# Altium PCB Bop_It (1).PcbDoc
Units mil, origin at the board's own origin, x right, y up, seen from the top; angles counter-clockwise.
Board outline 4495 x 3000 mil, 2 copper layers (Top Layer, Bottom Layer); 18 components, 17 nets, 72 pads, 6 vias.
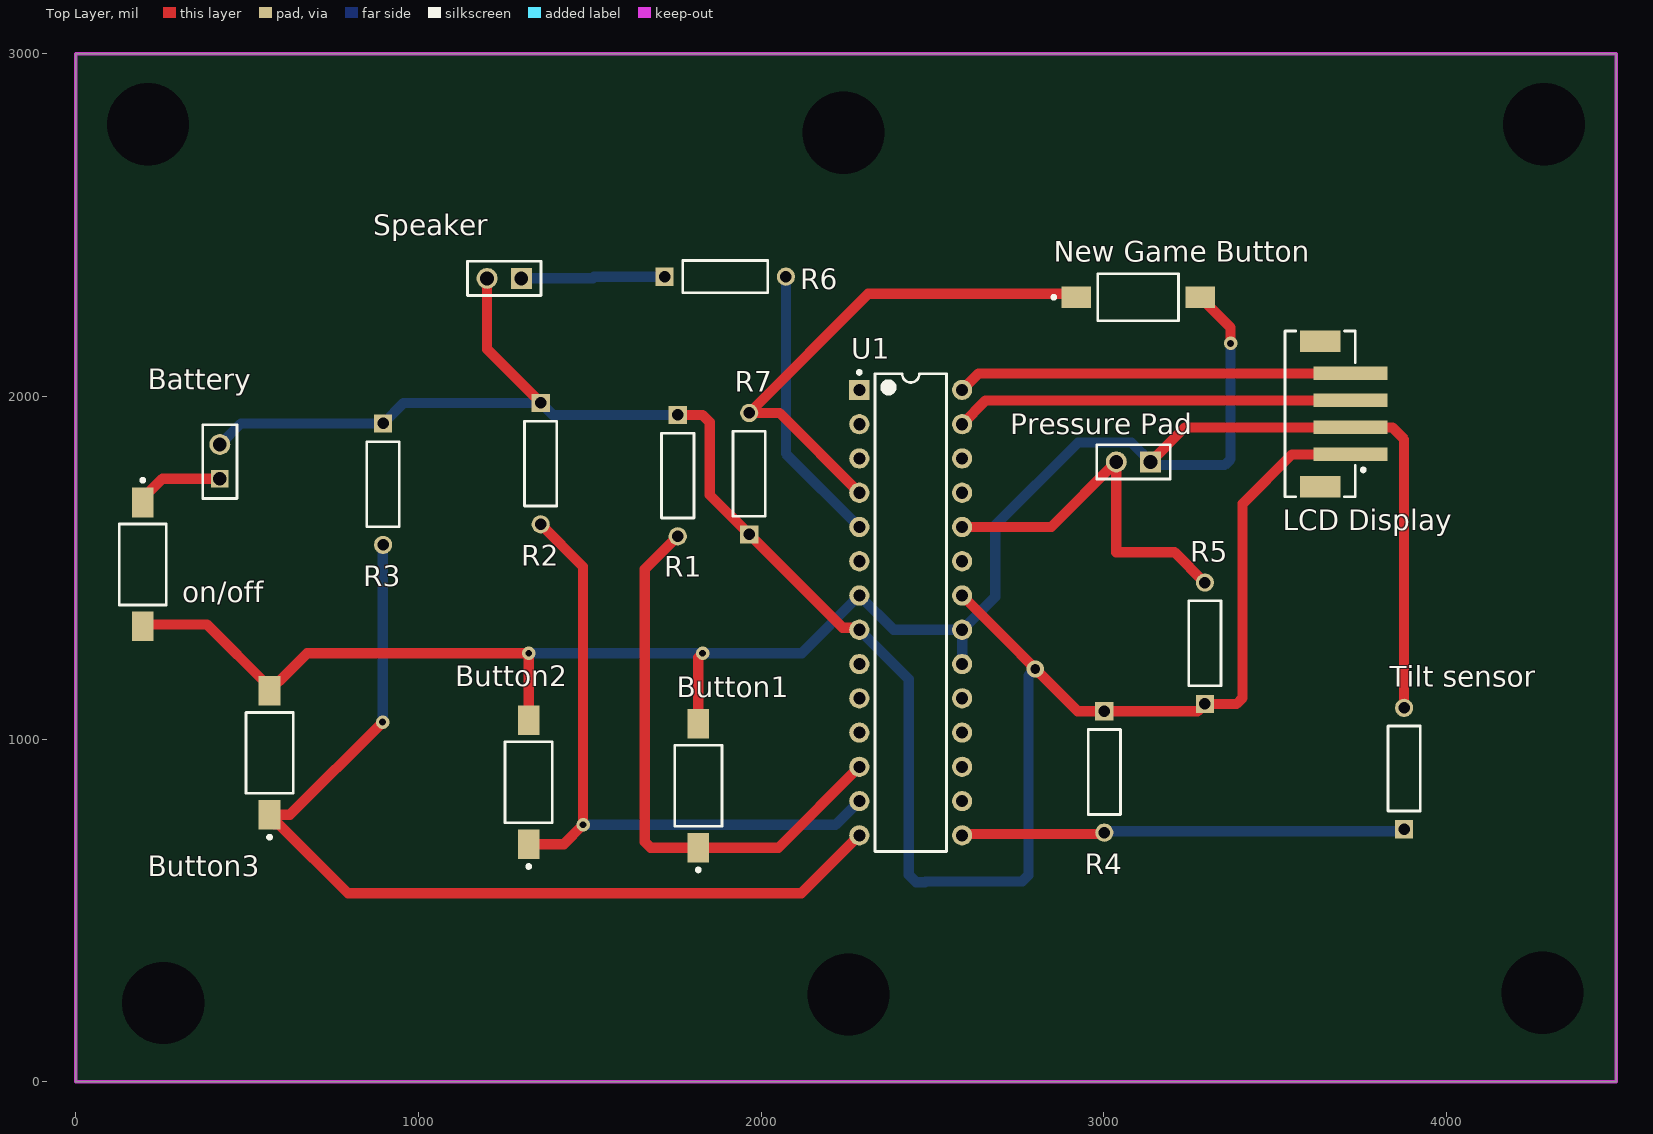
[diagram p0: Top Layer view]
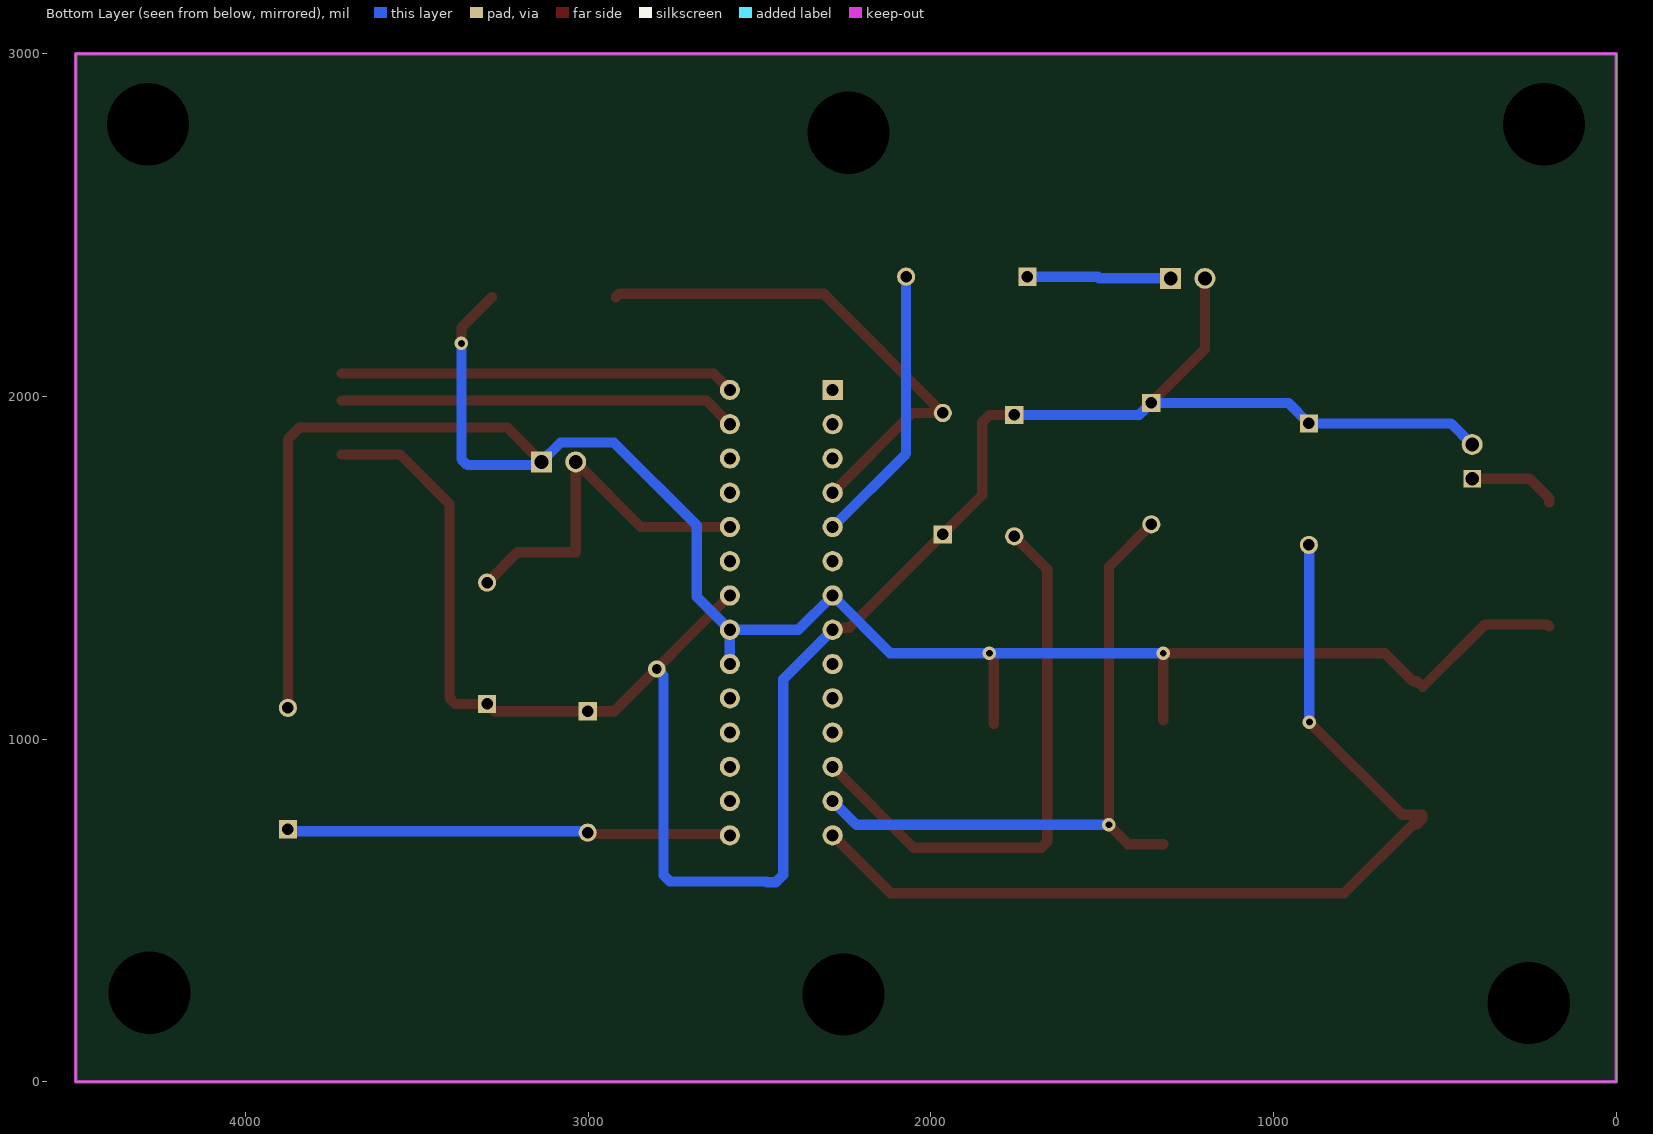
[diagram p1: Bottom Layer view, seen from below]
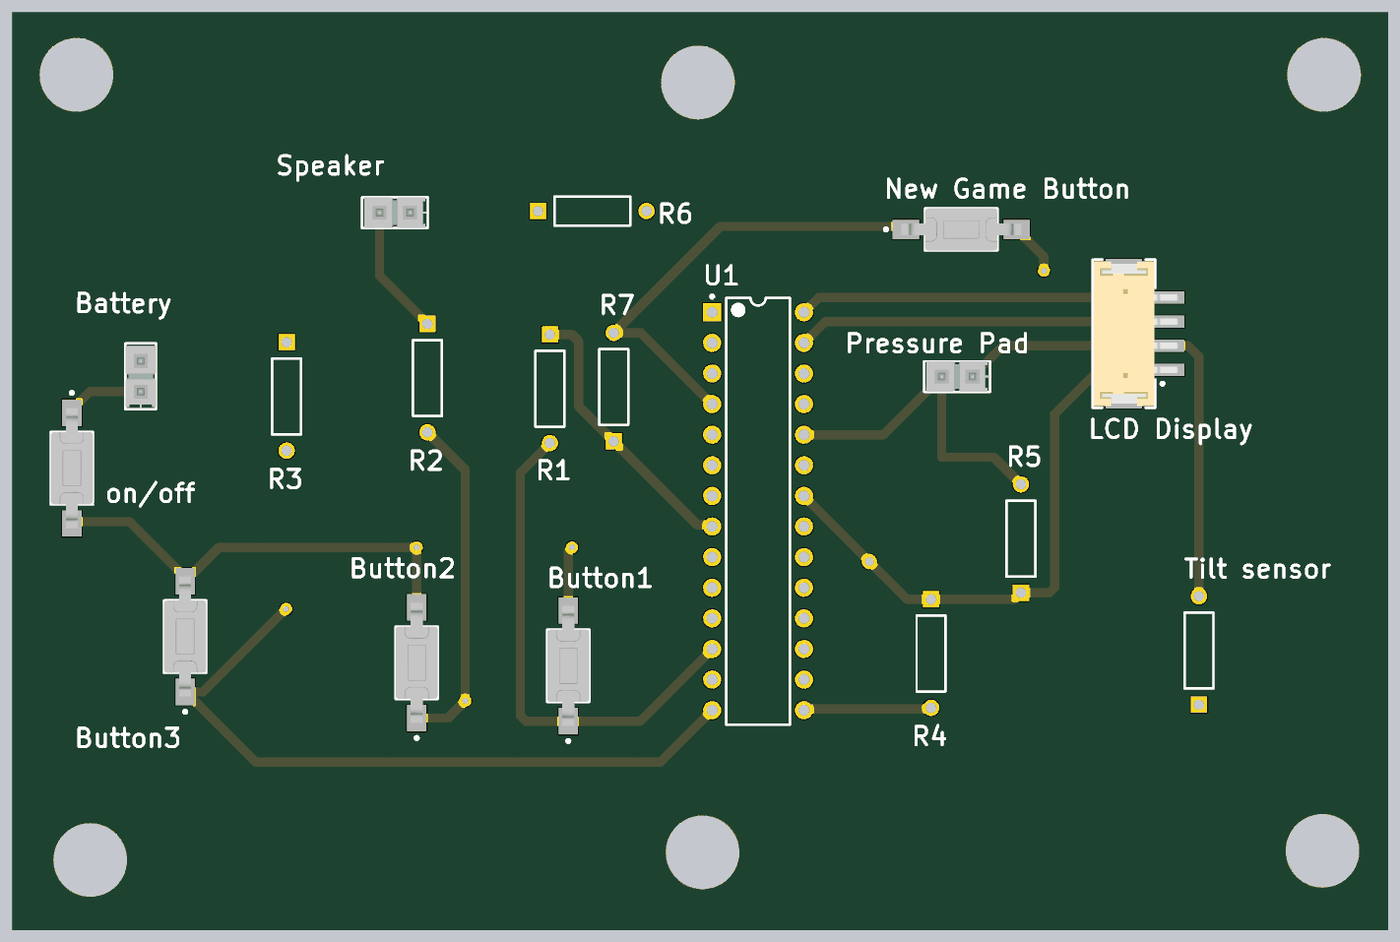
[diagram p2: 3D render of the assembled board from above, using the file's embedded part models]

## Layer stack, top to bottom
Top Solder: solder mask 0.4, Solder Resist, Dk 3.5
Top Layer: signal copper 1.4
Dielectric 1: dielectric 12.6, FR-4, Dk 4.8
Bottom Layer: signal copper 1.4
Bottom Solder: solder mask 0.4, Solder Resist, Dk 3.5

## Board outline
0,0 4495,0 4495,3000 0,3000

## Design rules (kind name [scope] priority, off if disabled: settings)
BoardOutlineClearance [All] p1: gap=7.87 ignorepadtopadclearanceinfootprint=FALSE except(15.75: Arc-SplitBarrior Arc-SplitContinuation Track-SplitBarrior Track-SplitContinuation SMDPad-SplitBarrior SMDPad-SplitContinuation THPad-SplitBarrior THPad-SplitContinuation Via-SplitBarrior Via-SplitContinuation Fill-SplitBarrior Fill-SplitContinuation Poly-SplitBarrior Poly-SplitContinuation Region-SplitBarrior Region-SplitContinuation Text-SplitBarrior Text-SplitContinuation)
Clearance "Clearance Bottom Layer" [OnLayer('Bottom Layer')] p1: gap=8 ignorepadtopadclearanceinfootprint=TRUE except(10: Arc-Text Track-Text SMDPad-Text THPad-Text Via-Text Fill-Text Poly-Text Region-Text Text-Text)
Clearance "Clearance Top Layer" [OnLayer('Top Layer')] p2: gap=8 ignorepadtopadclearanceinfootprint=TRUE except(10: Arc-Text Track-Text SMDPad-Text THPad-Text Via-Text Fill-Text Poly-Text Region-Text Text-Text)
Clearance [All] p3: gap=7.87 ignorepadtopadclearanceinfootprint=FALSE except(3.5: Arc-Arc Arc-Track Arc-SMDPad Track-Track Track-SMDPad SMDPad-SMDPad; 5: Arc-Via Track-Via SMDPad-Via THPad-Via Via-Via; 10: Arc-Text Track-Text SMDPad-Text THPad-Text Via-Text Fill-Text Poly-Text Region-Text Text-Text)
HoleSize [All] p1: absolutevalues=TRUE maxlimit=248.03 minlimit=7.87 maxpercent=80.000 minpercent=20.000
MinimumAnnularRing [All] p1: minimumring=3
MinimumSolderMaskSliver [All] p1: minsoldermaskwidth=3.94
PolygonConnect PolygonConnect_1 [All] p1: thpad.connectstyle=Relief thpad.reliefconductorwidth=20 thpad.reliefentries=4 thpad.polygonreliefangle="90 Angle" thpad.airgapwidth=10 smdpad.connectstyle=Relief smdpad.reliefconductorwidth=20 smdpad.reliefentries=4 smdpad.polygonreliefangle="90 Angle" smdpad.airgapwidth=10 via.connectstyle=Direct via.reliefconductorwidth=20 via.reliefentries=4 via.polygonreliefangle="90 Angle" via.airgapwidth=10
RoutingCorners [All] p1: cornerstyle=Round minsetback=100 maxsetback=100
RoutingVias [All] p1: holewidth=19.68 width=39.37 viastyle="Through Hole" minholewidth=7.87 minwidth=17.72 maxholewidth=39.37 maxwidth=78.74
SilkToSilkClearance [All] p1: silktosilkclearance=3.94
SilkToSolderMaskClearance [IsPad] p1: minsilkscreentomaskgap=3.94 clearancetoexposedcopper=TRUE
SolderMaskExpansion [All] p1: expansion=4 istentingtop=FALSE
Width [All] p1: maxlimit=100 minlimit=3.5 preferedwidth=15
25 further rules are at their usual default settings.

## Components (designator, comment, footprint, x,y, rotation, side; value= is the part's Value field where it differs from the comment)
Battery "1=V, 2=GND" SMTC-TSW-102-26-XX-S#1 420,1760 r90 top
Button1 "FSMSM" TECO-FSMSM-2_V 1816.42,864.37 r90 top
Button2 "FSMSM" TECO-FSMSM-2_V 1321.42,874.37 r90 top
Button3 "FSMSM" TECO-FSMSM-2_V 565,960 r90 top
"LCD Display" "1GND, 2V, 3SDA, 4SCL" 620304124022 3631.42,1949.37 r270 top
"New Game Button" "FSMSM" TECO-FSMSM-2_V 3100,2290 r0 top
on/off "FSMSM" TECO-FSMSM-2_V 195,1510 r270 top
"Pressure Pad" "1=V, 2=GND" SMTC-TSW-102-26-XX-S#2 3136.42,1809.37 r180 top
R1 "1k" RESA60-630X240 1756.42,1769.37 r270 top
R2 "1k" RESA60-630X240 1356.42,1804.37 r270 top
R3 "1k" RESA60-630X240 896.42,1744.37 r270 top
R4 "1k" RESA60-630X240 3001.42,904.37 r270 top
R5 "1k" RESA60-630X240 3295,1280 r90 top
R6 "150 Ohms" RESA60-630X240 1895,2350 r0 top
R7 "1k" RESA60-630X240 1965,1775 r90 top
Speaker "1=V, 2=GND" SMTC-TSW-102-26-XX-S#2 1300,2345 r180 top
"Tilt sensor" "Model" RESA60-630X240 3876.42,914.37 r90 top
U1 "ATmega328P-PU" 28P3 2436.42,1369.37 r0 top

## Footprints (in the part's own frame and the unit in brackets; to place one, negate y for a bottom-side part, rotate by r counter-clockwise, add the part's x,y. Pads: shape width x height; smd on the part's side, far side on the other; paste and mask are expansions set on the pad)
28P3 [mm] "28-Pin Plastic Dual In-Line Package (PDIP)"
  rect 1.5x1.5 hole 0.9: 1(-3.81,16.51)
  round 1.5 hole 0.9: 2(-3.81,13.97) 3(-3.81,11.43) 4(-3.81,8.89) 5(-3.81,6.35) 6(-3.81,3.81) 7(-3.81,1.27) 8(-3.81,-1.27) 9(-3.81,-3.81) 10(-3.81,-6.35) 11(-3.81,-8.89) 12(-3.81,-11.43) 13(-3.81,-13.97) 14(-3.81,-16.51) 15(3.81,-16.51) 16(3.81,-13.97) 17(3.81,-11.43) 18(3.81,-8.89) 19(3.81,-6.35) 20(3.81,-3.81) 21(3.81,-1.27) 22(3.81,1.27) 23(3.81,3.81) 24(3.81,6.35) 25(3.81,8.89) 26(3.81,11.43) 27(3.81,13.97) 28(3.81,16.51)
  silkscreen extent -3.93,-17.7 2.65,17.93, body extent -3.6,-17.65 3.6,17.65, height 4.58
620304124022 [mm] "2.00mm SMT Male Vertical Shrouded Header, 4p"
  rect 1x5.5 smd: 1(3,2.25) 2(1,2.25) 3(-1,2.25) 4(-3,2.25)
  rect 1.6x3 smd: MP1(-5.4,0) MP2(5.4,0)
  silkscreen extent -6.15,-2.6 6.15,3.32, body extent -6,-2.5 6,4.51, height 6.77
RESA60-630X240 [mm] "Axial Resistor, 2-Leads, Dia 2.4mm, Body Length 6.3mm"
  rect 1.35x1.35 hole 0.85: 1(-4.5,0)
  round 1.35 hole 0.85: 2(4.5,0)
  silkscreen extent -3.15,-1.2 3.15,1.2, body extent -3.15,-1.2 3.15,1.2, height 2.4
SMTC-TSW-102-26-XX-S#1 [mm] ".025 SQ Post Terminal Strip Assembly, 1x2 Pins, Vertical, 2.54mm Pitch, Male"
  rect 1.296x1.296 hole 1.02: 1(0,0)
  round 1.55 hole 1.02 mask+0.127: 2(2.54,0)
  silkscreen extent -1.46,-1.27 4,1.27, body extent -1.4,-1.27 3.81,1.27, height 8.38
SMTC-TSW-102-26-XX-S#2 [mm] ".025 SQ Post Terminal Strip Assembly, 1x2 Pins, Vertical, 2.54mm Pitch, Male"
  rect 1.55x1.55 hole 1.02: 1(0,0)
  round 1.55 hole 1.02: 2(2.54,0)
  silkscreen extent -1.46,-1.27 4,1.27, body extent -1.4,-1.27 3.81,1.27, height 8.38
TECO-FSMSM-2_V [mm] "SMD, 2-Leads, Body 6x3.5mm, Pitch 9.19mm"
  rect 2.2x1.6 smd: 1(-4.595,0)
  rect 2.18x1.6 smd: 2(4.595,0)
  silkscreen extent -6.37,-1.75 3,1.75, body extent -4.98,-1.75 4.98,1.75, height 4.4

## Part data
Battery "Pressure Pad" Speaker: library part CMP-1024-00329-1, "0.025\" SQ Post Header, Through-hole, Vertical, -55 to 125 degC, 2.54 mm Pitch, 2-Pin, Male, RoHS", Manufacturer=Samtec, PartNumber=TSW-102-26-F-S, Temperature Range="-55 to 125 degC", ComponentLink1Description="Manufacturer URL", ComponentLink1URL=http://www.samtec.com, ComponentLink2Description=Datasheet, ComponentLink2URL=http://www.samtec.com/documents/webfiles/pdf/TSW_TH.PDF, ComponentLink3Description="Package Specification", ComponentLink3URL=http://www.samtec.com/documents/webfiles/cpdf/TSW-XXX-XX-XXX-X-XX-XXX-MKT.pdf, DatasheetVersion=F-214, Mounting Technology=Through-hole, Orientation=Vertical, PackageDescription=".025[0.64] SQ. Post Terminal Strip Assembly", PackageReference=TSW-102-26-XX-S, PackageVersion="DM, 8/1988", Pitch="2.54 mm", RoHS=True
Button1 Button2 Button3 "New Game Button" on/off: library part CMP-2000-07511-1, "FSMSM Push Button Switch, 50 mA, -35 to 85 degC, 2-Pin SMD, RoHS, Bulk", Case\/Package=SMD/SMT, Contact Current Rating=50mA, Contact Resistance=100mOhm, Manufacturer="TE Connectivity", Max Operating Temperature=85degC, Max Voltage Rating (DC)=12V, Min Operating Temperature=-35degC, Operating Force=180gf, Package Description="2-Pin Surface Mount Device, Body 6 x 3.5 mm, Pitch 9.19 mm", Package Quantity=1000, Voltage Rating (DC)=24V, Actuator Length=1.07mm, Actuator Material=Polyamide, Contact Material=Brass, Contact Plating=Silver, Current Rating=50mA, Datasheet URL=http://www.te.com/commerce/DocumentDelivery/DDEController?Action=showdoc&DocId=Customer+Drawing%7F1437566-3%7FC2%7Fpdf%7FEnglish%7FENG_CD_1437566-3_C2_1437566_3_1_c.dwg.pdf%7F1437566-3, Datasheet Version="Rev. C2, 08/2014", Electrical Life=20000Cycles, ELV=Compliant, Illumination Type=Illuminated, Lead Free=LeadFree, Manufacturer URL=http://www.te.com/, Mechanical Life=20000Cycles, Mount=SurfaceMount, Mounting Technology=SurfaceMount, Orientation=Straight, Package Reference=FSMSM, Packaging=LoosePiece, REACH SVHC=Unknown, RoHSCompliant=true, Switch Travel=0.25mm, Termination=GullWing, Throw Configuration=SPST
"LCD Display": library part CMP-1502-00662-1, "Male Shrouded Header WR-WTB, SMT, Vertical, pitch 2 mm, 1 x 4 position", Contact Resistance=20mOhm, Manufacturer="Wurth Elektronik", Operating Temperature=-25to85degC, Package Reference=620304124022, Working Voltage=100VAC, Datasheet URL=https://katalog.we-online.de/em/datasheet/6203xx124022.pdf, Gender=Male, Manufacturer URL=http://www.we-online.de, Mounting Technology=SMT, Orientation=Vertical, Packaging=TapeandReel, Part Number=620304124022, Pitch=2mm, Position=1x4, Publisher=WurthElektronik
R1 R2 R3 R4 R5 R6 R7 "Tilt sensor": library part CMP-1659-00075-1, "Axial Resistor, 1 KOhm, +/- 1%, 250 mW, -55 to 155 degC, 2-Pin THD, RoHS, Bulk", Case\Package=Axial, Max Operating Temperature="155 degC", Min Operating Temperature="-55 degC", Package Quantity=200, Power Rating="250 mW", Resistance="10 kohm", Tolerance=1%, Voltage Rating="250 V", ComponentLink1Description="Manufacturer URL", ComponentLink1URL=http://www.yageo.com/, ComponentLink2Description=Datasheet, ComponentLink2URL=http://www.yageo.com/documents/recent/Yageo%20LR_MFR_2013.pdf, DatasheetVersion=Apr-13, Length="0.248 inch", PackageDescription="2-Pin Axial Lead, Dia 2.4 mm, Body Length 6.3 mm", PackageReference=MFR-25, Packaging=Bulk, RoHSCompliant=true
U1: library part CMP-0095-00013-2, "8-bit AVR Microcontroller, 32KB Flash, 1KB EEPROM, 2KB SRAM, 28-pin PDIP, Industrial Grade (-40°C to 85°C)", ComponentLink1Description="Manufacturer URL", ComponentLink1URL=http://www.atmel.com/, ComponentLink2Description="ATmega48A/48PA/88A/88PA/168A/168PA/328/328P Datasheet", ComponentLink2URL=http://www.atmel.com/dyn/resources/prod_documents/8271.pdf, ComponentLink3Description="ATmega48A/48PA/88A/88PA/168A/168PA/328/328P Summary", ComponentLink3URL=http://www.atmel.com/dyn/resources/prod_documents/8271S.pdf, DatasheetVersion="revD, May-2011", PackageDescription="28-lead (0.300\"/7.62mm Wide) Plastic Dual Inline Package (PDIP)", PackageReference=28P3, PackageVersion="revB, Sep-2001", RevisionNote="DatasheetVersion updated. URLs added."

## Free pads (board coordinates)
  round 60 hole 240: 2(210,2795) 2(255,230) 2(2240,2770) 2(2255,255) 2(4280,260) 2(4285,2795)

## Via types
v1: diameter 39.37, hole 19.68, Top Layer to Bottom Layer, 5 vias
v2: diameter 50, hole 28, Top Layer to Bottom Layer, 1 vias

## Nets (pads, with @x,y where several pads share a name; then routed paths per layer and width w, separated by ;. In a path a pad name is that pad's centre, name@x,y a point inside that pad or via, vN(x,y) a via of type N, cw(c..) or ccw(c..) an arc to the next point about the centre after c; other vN are vias at no path point)
1=programmer: U1.1
17=programmer: U1.17
18=programmer: U1.18
19=programmer: U1.19
GND: "LCD Display.1" Battery.2 R1.1 R2.1 R3.1 R4.1 R5.1 R7.1 Speaker.2 U1.8 U1.22 | length 6414
  Top Layer w30: Speaker.2 1200,2137.95 R2.1 ; R1.1@1757.95,1945 R1.1 1828.46,1946.54 1850,1925 1850,1712.83 R7.1 2237.91,1324.93 2280.86,1324.93 U1.8 ; U1.22 2924.25,1081.54 R4.1 3273.7,1081.54 R5.1 3387.43,1102.83 3405,1120.41 3405,1687 3549.26,1831.26 3720,1831.26
  Bottom Layer w30: Battery.2 481.54,1921.54 R3.1 956.42,1981.54 R2.1 1391.42,1946.54 R1.1 ; U1.8 2430.79,1175 2430.79,604.21 2452.57,582.43 2477.43,582.43 2480,585 2762.43,585 2780,602.57 2780,1185 v2(2800,1205)
NetBattery_1: Battery.1 on/off.1 | length 260.5
  Top Layer w30: on/off.1 195,1702.72 252.28,1760 Battery.1
NetButton1_1: Button1.1 R1.2 U1.12 | length 1662.5
  Top Layer w30: R1.2 1660,1495.79 1660,701.04 1677.57,683.46 Button1.1 2050.51,683.46 U1.12
NetButton1_2: "LCD Display.2" "New Game Button.2" "Pressure Pad.1" "Tilt sensor.2" Button1.2 Button2.2 Button3.2 on/off.2 U1.7 U1.20 U1.21 | length 6383.7
  Top Layer w30: on/off.2 200.91,1335 382.32,1335 565,1152.32 581.5,1168.82 592.91,1168.82 675.09,1251 v1(1321.42,1251) Button2.2 ; Button1.2 1816.42,1238.42 v1(1829,1251) ; 3136.42,1809.37 3237.05,1910 3720,1910 3841.42,1910 3876.42,1875 3876.42,1091.54 ; 3280.91,2290 3370,2200.91 v1(3370,2155)
  Bottom Layer w30: v1(1321.42,1251) v1(1829,1251) 2118.05,1251 U1.7 2386.42,1319.37 U1.21 ; U1.20 U1.21 ; v1(3370,2155) 3370,1817.57 3352.43,1800 3145.79,1800 3136.42,1809.37 3079.79,1866 2925,1866 2683,1624 2683,1415.95 U1.21
NetButton2_1: Button2.1 R2.2 U1.13 | length 1945.5
  Top Layer w30: Button2.1 1423.46,693.46 v1(1480,750) 1480,1503.62 R2.2
  Bottom Layer w30: v1(1480,750) 2217.05,750 U1.13
NetButton3_1: Button3.1 R3.2 U1.14 | length 2853.4
  Top Layer w30: v1(895,1050) 624.09,779.09 Button3.1 565,767.28 581.5,750.79 593.31,750.79 794.09,550 2117.05,550 U1.14
  Bottom Layer w30: v1(895,1050) 895.71,1050.71 895.71,1566.49 R3.2
"NetLCD Display_3": "LCD Display.3" U1.27 | length 1162.3
  Top Layer w30: U1.27 2655.79,1988.74 3720,1988.74
"NetLCD Display_4": "LCD Display.4" U1.28 | length 1153.5
  Top Layer w30: U1.28 2634.53,2067.48 3720,2067.48
"NetNew Game Button_1": "New Game Button.1" R7.2 U1.4 | length 1520.2
  Top Layer w30: U1.4 2053.62,1952.17 R7.2 2312.83,2300 2909.09,2300 2919.09,2290
"NetPressure Pad_2": "Pressure Pad.2" R5.2 U1.24 | length 1087.6
  Top Layer w30: U1.24 2846.42,1619.37 3036.42,1809.37 3036.42,1545.75 3206.42,1545.75 R5.2
NetR4_2: "Tilt sensor.1" R4.2 U1.15 | length 1297.4
  Top Layer w30: U1.15 2590.34,723.29 2997.5,723.29 R4.2
  Bottom Layer w30: R4.2 3005.85,731.63 3870.85,731.63 3876.42,737.2
NetR6_1: R6.1 Speaker.1 | length 419.9
  Bottom Layer w30: Speaker.1 1508,2345 1513,2350 R6.1
NetR6_2: R6.2 U1.5 | length 819.4
  Bottom Layer w30: R6.2 2072.17,1833.62 U1.5
pads on no net: "LCD Display.MP1" "LCD Display.MP2" U1.2 U1.3 U1.6 U1.9 U1.10 U1.11 U1.16 U1.23 U1.25 U1.26

## Keep-outs
Keep-Out Layer:
  the board outline again, w10